# Allegro board HY_TYPEC_DBUG_V10B.brd
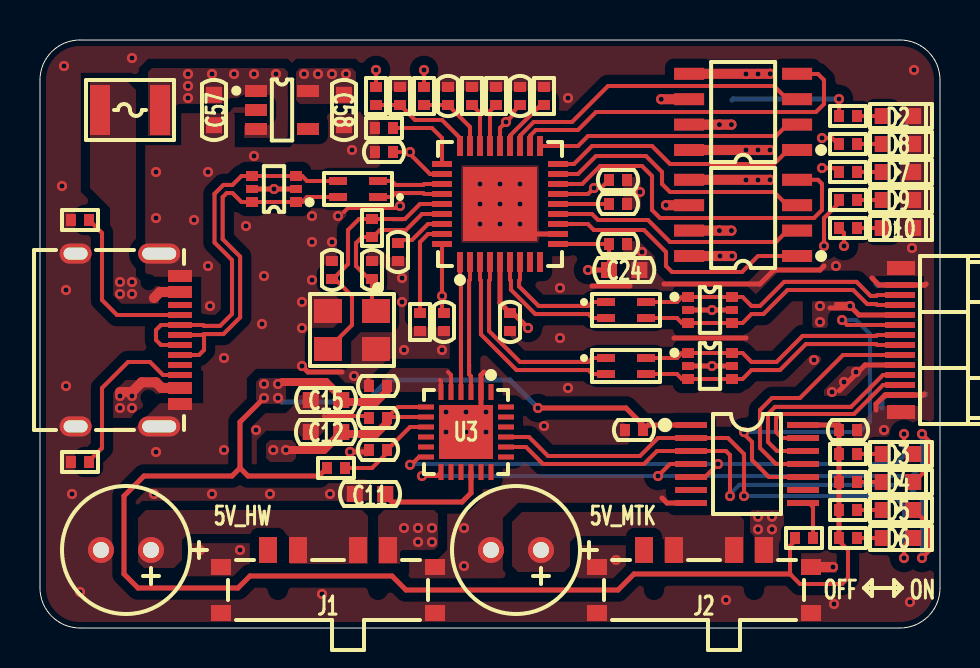
[diagram p0: board, top side]
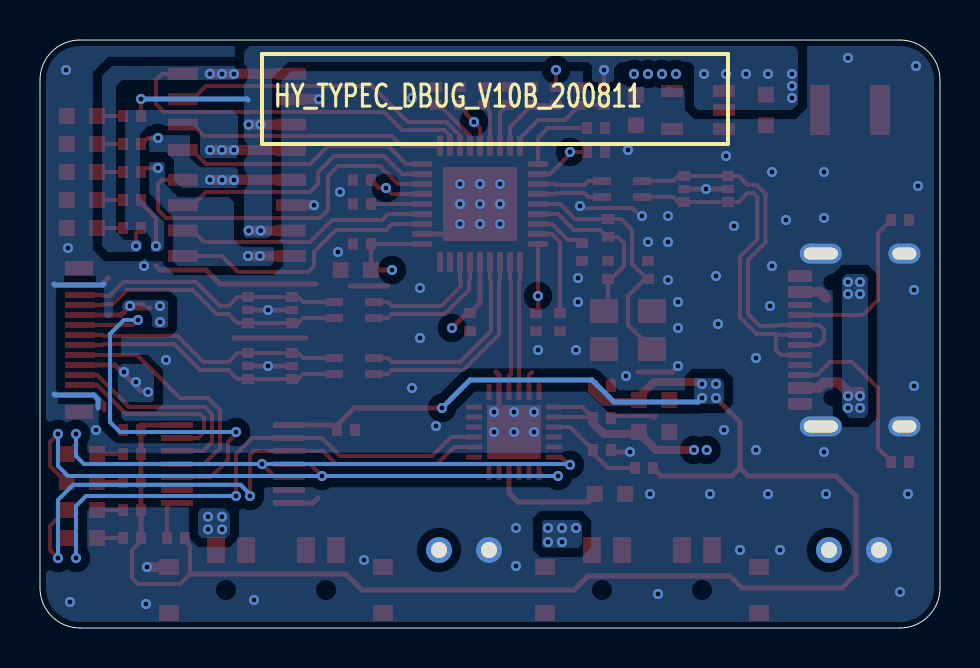
[diagram p1: board, bottom side, seen from below]

Outline 45 x 29.4 mm; copper layers: TOP, L02_GND, L03_VCC, BOTTOM. Coordinates in mm from the lower left corner of the outline.
Outline path: 0,27.4 arc(0.59,28.81) 2,29.4 43,29.4 arc(44.41,28.81) 45,27.4 45,2 arc(44.41,0.59) 43,0 2,0 arc(0.59,0.59) 0,2 0,27.4

## Design rules (mm)
constraint set DEFAULT: min track width 0.203, pair gap 0.203
net group HW_USB_D: nets HW_USB_DM HW_USB_DP
net group MTK_USB_D: nets MTK_USB_DM MTK_USB_DP
net group USB_D: nets USB_DM USB_DP
net group USBDN1_D: nets USBDN1_DM USBDN1_DP
net group USBDN2_D: nets USBDN3_DM USBDN3_DP
net group USBDN3_D: nets USBDN2_DM USBDN2_DP
net group USBDN4_D: nets USBDN4_DM USBDN4_DP
net group USBUP_D: nets USBUP_DM USBUP_DP

## Placement (name value [footprint] x y rotation side)
C2  8pF_50V  [C0402]  16.6 17.9 270 top
C3  8pF_50V  [C0402]  14.6 17.9 270 top
C11  10uF_10V  [C0603]  16.5 6.7 180 top
C12  10uF_10V  [C0603]  14.3 9.8 0 top
C14  100nF_50V  [C0402]  16.9 10.5 0 top
C15  10uF_10V  [C0603]  14.3 11.4 0 top
C16  100nF_50V  [C0402]  16.9 12.1 0 top
C17  100nF_50V  [C0402]  20.4 26.6 270 top
C18  100nF_50V  [C0402]  17.9 18.8 90 top
C19  100nF_50V  [C0402]  28.9 21.2 180 top
C20  100nF_50V  [C0402]  20.2 15.3 90 top
C21  100nF_50V  [C0402]  17.2 23.8 0 top
C22  100nF_50V  [C0402]  28.9 22.4 180 top
C23  100nF_50V  [C0402]  24 26.6 270 top
C24  10uF_10V  [C0603]  29.21 17.9 0 top
C25  100nF_50V  [C0402]  23.5 15.3 90 top
C26  100nF_50V  [C0402]  28.9 19.2 180 top
C55  470uF_6V3  [CAP-2R5-6R3X7]  23.8 3.9 180 top
C56  470uF_6V3  [CAP-2R5-6R3X7]  4.3 3.9 180 top
C57  10uF_10V  [C0603]  8.7 25.9 270 top
C58  10uF_10V  [C0603]  15.2 25.9 270 top
C59  100nF_50V  [C0402]  16.9 8.9 0 top
C60  100nF_50V  [C0402]  40.4 9.9 0 top
C61  100nF_50V  [C0402]  29.7 9.9 180 top
D2  LED_GREEN  [LED0603]  42.9 25.6 0 top
D3  LED_RED  [LED0603]  42.9 8.7 0 top
D4  LED_GREEN  [LED0603]  42.9 7.3 0 top
D5  LED_RED  [LED0603]  42.9 5.9 0 top
D6  LED_GREEN  [LED0603]  42.9 4.5 0 top
D7  LED_GREEN  [LED0603]  42.9 22.8 0 top
D8  LED_GREEN  [LED0603]  42.9 24.2 0 top
D9  LED_GREEN  [LED0603]  42.9 21.4 0 top
D10  LED_GREEN  [LED0603]  42.9 20 0 top
F1  SMD1210-200  [FUSE1210]  4.5 25.9 180 top
J1  -  [K3-1208S-E1]  14.4 1.9 0 top
J2  -  [K3-1208S-E1]  33.2 1.9 0 top
L2  ACM2012-900-2P-T002  [ACM2012]  15.9 21.95 180 top
L3  ACM2012-900-2P-T002  [ACM2012]  29.3 13.1 0 top
L4  ACM2012-900-2P-T002  [ACM2012]  29.3 15.9 0 top
NOREF  -  []  0 0 90 top
NOREF#2  -  []  0 0 0 top
R9  10K  [R0402]  40.4 25.6 180 top
R10  10K  [R0402]  14.8 8 0 top
R11  4.7K  [R0402]  2 20.4 0 top
R12  10K  [R0402]  40.4 8.7 180 top
R13  10K  [R0402]  40.4 7.3 180 top
R14  10K  [R0402]  40.4 5.9 180 top
R15  4.7K/NI  [R0402]  2 8.3 180 top
R16  10K  [R0402]  40.4 4.5 180 top
R17  100K  [R0402]  16.8 26.6 270 top
R18  100K  [R0402]  18 26.6 270 top
R19  100K  [R0402]  17.2 25 0 top
R20  100K  [R0402]  19.2 26.6 270 top
R21  12K  [R0402]  19 15.3 270 top
R22  100K  [R0402]  21.6 26.6 270 top
R23  100K  [R0402]  22.8 26.6 270 top
R24  100K  [R0402]  25.2 26.6 270 top
R25  10K  [R0402]  40.4 22.8 180 top
R26  10K  [R0402]  40.4 24.2 180 top
R27  10K  [R0402]  40.4 21.4 180 top
R28  10K  [R0402]  40.4 20 180 top
R29  1M  [R0402]  16.6 20 270 top
R30  10K  [R0402]  38.2 4.5 0 top
U2  NX3225GA-24MHZ  [X-4P-3R2X2R5-SMD]  15.6 14.9 180 top
U3  CP2105  [QFN24-4X4X0R5-2R7X2R7]  21.3 9.8 180 top
U4  TPD4E1U06DCKR  [SOT363]  33.5 15.9 270 top
U5  -  [U261-24XN-4BS60]  43 14.4 270 top
U6  TPD4E1U06DCKR  [SOT363]  33.5 13.1 270 top
U7  TPD4E1U06DCKR  [SOT363]  11.7 21.95 90 top
U8  USB2514B_QFN36_MIN  [QFN36-6X6X0R5-3R7X3R7]  23 21.2 0 top
U9  MIC2026-1YM  [SOIC8]  35.15 20.5 90 top
U10  MIC2026-1YM  [SOIC8]  35.15 25.8 90 top
U29  SPX3819M5-L-3-3/TR  [SOT23-5]  12.1 25.9 270 top
U30  TXS0104EPWR  [TSSOP14]  35.35 8.2 270 top
USB1  -  [TYPE-C-31-M-12]  7 14.4 270 top

## Library data of the parts
C2 C3 C12 C14-C16 C24 C57-C61 = CAP NP_2
C11 C17-C23 C25 C26 = CAP NP
C55 C56 = CAPT_100UF_3528_6r3V_10%_LXXXX
D2-D10 = LED_4
F1 = FUSE
J1 J2 = K3-1208S-E1
L2-L4 = 744822222_0
R9-R30 = R_Generic
U2 = TSX-3225
U3 = CP2105_9
U4 U6 U7 = TPD4E1U06DBVR
U5 = USB-C-24P
U8 = USB2514B_QFN36_MIN
U9 U10 = MIC2026-1YM
U29 = SPX3819M5-L-1-2
U30 = TXB0104PWR
USB1 = TYPE-C_16P

## Footprints (pads in the part's own frame, mm; a bottom-side part is the same pattern mirrored in y, then rotated)
ACM2012
  rect 0.9x0.4 smd: 1(-1,0.4) 2(-1,-0.4) 3(1,-0.4) 4(1,0.4)
C0402
  rect 0.5x0.6 smd: 1(-0.45,0) 2(0.45,0)
C0603
  rect 0.8x0.8 smd: 1(-0.762,0) 2(0.762,0)
CAP-2R5-6R3X7
  round 1.3 hole 0.8: 1(-1.25,0) 2(1.25,0)
FUSE1210
  rect 1x2.5 smd: 1(-1.5,0) 2(1.5,0)
K3-1208S-E1
  rect 1x0.8 smd: 1(-5.35,1.15) 2(-5.35,-1.15) 3(5.35,-1.15) 4(5.35,1.15)
  rect 0.9x1.3 smd: 5(3,2) 6(1.5,2) 7(-1.5,2) 8(-3,2)
LED0603
  rect 0.8x0.8 smd: 1(-0.762,0) 2(0.762,0)
QFN24-4X4X0R5-2R7X2R7
  rect 0.25x0.8 smd: 1(-1.25,-2) 2(-0.75,-2) 3(-0.25,-2) 4(0.25,-2) 5(0.75,-2) 6(1.25,-2) 13(1.25,2) 14(0.75,2) 15(0.25,2) 16(-0.25,2) 17(-0.75,2) 18(-1.25,2)
  rect 0.8x0.25 smd: 7(2,-1.25) 8(2,-0.75) 9(2,-0.25) 10(2,0.25) 11(2,0.75) 12(2,1.25) 19(-2,1.25) 20(-2,0.75) 21(-2,0.25) 22(-2,-0.25) 23(-2,-0.75) 24(-2,-1.25)
  rect 2.7x2.7 smd: 25(0,0)
QFN36-6X6X0R5-3R7X3R7
  rect 0.3x1 smd: 1(-2,-2.9) 2(-1.5,-2.9) 3(-1,-2.9) 4(-0.5,-2.9) 5(0,-2.9) 6(0.5,-2.9) 7(1,-2.9) 8(1.5,-2.9) 9(2,-2.9) 19(2,2.9) 20(1.5,2.9) 21(1,2.9) 22(0.5,2.9) 23(0,2.9) 24(-0.5,2.9) 25(-1,2.9) 26(-1.5,2.9) 27(-2,2.9)
  rect 1x0.3 smd: 10(2.9,-2) 11(2.9,-1.5) 12(2.9,-1) 13(2.9,-0.5) 14(2.9,0) 15(2.9,0.5) 16(2.9,1) 17(2.9,1.5) 18(2.9,2) 28(-2.9,2) 29(-2.9,1.5) 30(-2.9,1) 31(-2.9,0.5) 32(-2.9,0) 33(-2.9,-0.5) 34(-2.9,-1) 35(-2.9,-1.5) 36(-2.9,-2)
  rect 3.7x3.7 smd: 37(0,0)
R0402
  rect 0.5x0.6 smd: 1(-0.45,0) 2(0.45,0)
SOIC8
  rect 0.6x1.5 smd: 1(-1.9,-2.7) 2(-0.63,-2.7) 3(0.64,-2.7) 4(1.91,-2.7) 5(1.91,2.7) 6(0.64,2.7) 7(-0.63,2.7) 8(-1.9,2.7)
SOT23-5
  rect 0.6x1.1 smd: 1(-0.95,-1.3) 2(0,-1.3) 3(0.95,-1.3) 4(0.95,1.3) 5(-0.95,1.3)
SOT363
  rect 0.5x0.6 smd: 1(-0.65,-1.1) 3(0.65,-1.1) 4(0.65,1.1) 6(-0.65,1.1)
  rect 0.4x0.6 smd: 2(0,-1.1) 5(0,1.1)
TSSOP14
  rect 0.3x1.6 smd: 1(-1.95,-2.8) 2(-1.3,-2.8) 3(-0.65,-2.8) 4(0,-2.8) 5(0.65,-2.8) 6(1.3,-2.8) 7(1.95,-2.8) 8(1.95,2.8) 9(1.3,2.8) 10(0.65,2.8) 11(0,2.8) 12(-0.65,2.8) 13(-1.3,2.8) 14(-1.95,2.8)
TYPE-C-31-M-12
  rect 0.6x1.2 smd: 1(-3.2,0) 2(-2.4,0) 11(2.4,0) 12(3.2,0)
  rect 0.3x1.2 smd: 3(-1.75,0) 4(-1.25,0) 5(-0.75,0) 6(-0.25,0) 7(0.25,0) 8(0.75,0) 9(1.25,0) 10(1.75,0)
  oval 1x2.1 hole 0.6x1.7: 13(-4.32,-1.04) 14(4.32,-1.04)
  oval 1x1.6 hole 0.6x1.2: 15(-4.32,-5.22) 16(4.32,-5.22)
U261-24XN-4BS60
  rect 0.7x1.4 smd: 1(-3.6,0.05) 2(3.6,0.05) 3(3.6,0.05) 4(-3.6,0.05)
  rect 0.3x1.5 smd: A1(-2.75,0) A2(-2.25,0) A3(-1.75,0) A4(-1.25,0) A5(-0.75,0) A6(-0.25,0) A7(0.25,0) A8(0.75,0) A9(1.25,0) A10(1.75,0) A11(2.25,0) A12(2.75,0) B1(2.75,0) B2(2.25,0) B3(1.75,0) B4(1.25,0) B5(0.75,0) B6(0.25,0) B7(-0.25,0) B8(-0.75,0) B9(-1.25,0) B10(-1.75,0) B11(-2.25,0) B12(-2.75,0)
X-4P-3R2X2R5-SMD
  rect 1.4x1.2 smd: 1(-1.2,-0.95) 2(1.2,-0.95) 3(1.2,0.95) 4(-1.2,0.95)

## Nets
GND: C2.1 C3.1 C11.2 C12.1 C14.1 C15.1 C16.1 C17.1 C18.1 C19.1 C20.1 C21.1 C22.1 C23.1 C24.2 C25.1 C26.1 C55.2 C56.2 C57.2 C58.2 C59.1 C60.2 C61.2 D2.2(CATHODE) D7.2(CATHODE) D8.2(CATHODE) D9.2(CATHODE) D10.2(CATHODE) J1.1 J1.2 J1.3 J1.4 J2.1 J2.2 J2.3 J2.4 R11.1 R15.2 R18.1 R19.1 R21.2 R22.1 R23.1 R24.1 U2.2 U2.4 U3.2 U3.25 U4.2 U4.5(NC) U5.1 U5.2 U5.3 U5.4 U5.A1 U5.A12 U5.B1 U5.B12 U6.2 U6.5(NC) U7.2 U7.5(NC) U8.11 U8.37 U9.6 U10.6 U29.2 U30.7 USB1.1 USB1.12 USB1.13 USB1.14 USB1.15 USB1.16
VCC_3.3V: C20.2 C21.2 C22.2 C23.2 C24.1 C25.2 C26.2 C58.1 R20.1 U8.5 U8.10 U8.15 U8.23 U8.29 U8.36 U29.5(VOUT)
VCC_3.3V_CP2105: C15.2 C16.2 C60.1 C61.1 R10.1 R12.2 R13.2 R14.2 R16.2 R30.1 U3.5(VIO) U3.6 U30.1 U30.14(VCCB)
VCC_5V_HW: J1.5 U5.A9
VCC_5V_MTK: J2.5 U5.A4
VCC_5V_VBUS: C57.1 F1.1 R9.2 R17.1 U9.7 U10.7 U29.1 U29.3
VCC_PWR1: C12.2 C14.2 R25.2 U3.7 U3.8 U9.8
VCC_PWR2: C56.1 J1.6 J1.7 R26.2 U9.5(OUTB)
VCC_PWR3: C55.1 J2.6 J2.7 R27.2 U10.8
VCC_PWR4: R28.2 U10.5(OUTB)
HW_RX: U5.A11 U30.13
HW_TX: U5.A10 U30.12
HW_USB_DM: L3.3 U5.A7 U6.3 U6.4
HW_USB_DP: L3.4 U5.A6 U6.1 U6.6
MTK_RX: U5.A8 U30.11
MTK_TX: U5.A5 U30.10
MTK_USB_DM: L4.3 U4.3 U4.4 U5.A3
MTK_USB_DP: L4.4 U4.1 U4.6 U5.A2
OCS_N1: U8.13 U9.2
OCS_N2: U8.17 U9.3
OCS_N3: U8.19 U10.2
OCS_N4: U8.21 U10.3
PRTPWR1: U8.12 U9.1
PRTPWR2: U8.16 U9.4
PRTPWR3: U8.18 U10.1
PRTPWR4: U8.20 U10.4
RESETN: C17.2 R20.2 U8.26
T_HW_RX: D6.2(CATHODE) U3.21 U30.2
T_HW_TX: D5.2(CATHODE) U3.20 U30.3
T_MTK_RX: D4.2(CATHODE) U3.13 U30.4
T_MTK_TX: D3.2(CATHODE) U3.12 U30.5
USB_DM: L2.3 U7.3 U7.4 USB1.5 USB1.7
USB_DP: L2.4 U7.1 U7.6 USB1.6 USB1.8
USBDN1_DM: U3.4 U8.1
USBDN1_DP: U3.3 U8.2
USBDN2_DM: L3.2 U8.3
USBDN2_DP: L3.1 U8.4
USBDN3_DM: L4.2 U8.6
USBDN3_DP: L4.1 U8.7
USBDN4_DM: U8.8
USBDN4_DP: U8.9
USBUP_DM: L2.2 U8.30
USBUP_DP: L2.1 U8.31
XTAL1: C2.2 R29.2 U2.1 U8.33
XTAL2: C3.2 R29.1 U2.3(OUT2) U8.32(XTAL2/CLKIN_EN)
N17371022: D2.1 R9.1
N17384741: R17.2 R18.2 U8.27
N17384990: R19.2 U8.28
N17385565: C18.2 U8.34
N17385621: C19.2 U8.14
N17386850: R21.1 U8.35
N17387208: R24.2 U8.22
N17387211: R23.2 U8.24
N17387214: R22.2 U8.25
N17388288: D7.1 R25.1
N17388415: D8.1 R26.1
N17388544: D9.1 R27.1
N17388675: D10.1 R28.1
N17392787: C11.1 U3.16
N17392839: C59.2 R10.2 U3.9
N17392961: D3.1 R12.1
N17392986: D4.1 R13.1
N17393011: D5.1 R14.1
N17393034: D6.1 R16.1
N17394522: R11.2 USB1.4
N17394528: F1.2 USB1.2 USB1.11(VBUS2)
N17394640: R15.1 USB1.10
N17401111: R30.2 U30.8

Pads without a net: J1 8; J2 8; U3 1 10 11 14 15 17 18 19 22 23 24; U5 B2 B3 B4 B5 B6 B7 B8 B9 B10 B11; U29 4; U30 6 9; USB1 3 9

## Via types
v1: diameter 0.508, hole 0.254, TOP to BOTTOM, 164 vias

## Routing (per net, layer and track width the routed paths; a pad name or vN(x,y) marks a point on that pad's centre or on a via; arc(x,y) is an arc through that point)
GND: length 52.6
  TOP w0.203: 15.2,20.8 15.4,21 17.9,21 v1(18,21.1) ; C14.1 16.35,10.6 14.4,10.6 14.3,10.5 14.2,10.6 ; C16.1 16.45,12.35 16.4,12.4
  TOP w0.254: U6.2 v1(33.6,13.1) U6.5 ; C59.1 16.36,8.81 v1(15.5,8.81) ; 31.2,17.2 36,17.2 36.7,17.9 39,17.9 39.2,18.1 ; 22.2,12.8 22.05,12.65 U3.2 22.05,11.05 v1(22.3,10.8) v1(21.3,9.8) ; 15.1,12.8 13.4,12.8 v1(13.1,13.1) ; U7.5 v1(11.7,21.95) U7.2 ; 41.8,10.9 41.8,11.2 42.25,11.65 U5.A12 44.15,11.65 44.2,11.7 ; U8.11 24.5,19.7 v1(24,20.2) v1(23,21.2) ; 44.3,17.2 44.25,17.15 U5.A1 41.95,17.15 41.6,17.5 ; U4.2 v1(33.6,15.9) U4.5 ; 31.7,14.5 35.3,14.5 ; U30.7 31.35,6.25 31.1,6.5 ; 27.6,17.1 29.5,17.1
  TOP w0.508: U10.6 v1(31.06,26.44) ; U9.6 v1(31.3,21.14) ; J2.4 v1(39.65,3.05)
  BOTTOM w0.254: 41.8,17.2 41.85,17.15 U5.A1 44.25,17.15 44.3,17.2 ; 44.3,11.7 44.25,11.65 U5.A12 42.31,11.65 42.1,11.43 42.1,11
  vias: v1(1.1,22.1) v1(1.2,28.1) v1(1.3,16.9) v1(1.3,12.1) v1(1.6,6.7) v1(2,1.8) v1(4.6,28.5) v1(5.7,6.7) v1(5.8,22.8) v1(5.8,20.5) v1(5.8,8.8) v1(7.7,20.4) v1(8,3.9) v1(8.4,22.8) v1(8.4,18.1) v1(8.5,16.1) v1(8.6,6.7) v1(9.2,13.5) v1(9.2,8.9) v1(10,3.9) v1(10.3,20.1) v1(10.7,23.6) v1(10.8,9.9) v1(11.1,15.2) v1(11.2,17.6) v1(11.5,6.7) v1(13.1,16.3) v1(13.1,15) v1(13.6,20.6) v1(13.6,19.3) v1(13.6,17.4) v1(14.1,1.7) v1(14.5,6.7) v1(14.6,19.3) v1(14.9,20.6) v1(15.6,23.9) v1(15.7,12.6) v1(18.1,17.5) v1(18.1,16.3) v1(18.2,13.9) v1(20.1,13.9) v1(20.3,10.8) v1(20.3,9.8) v1(21.2,5) v1(21.2,3.1) v1(21.3,10.8) v1(22,22.2) v1(22,21.2) v1(22,20.2) v1(22.3,9.8) v1(23,22.2) v1(23,20.2) v1(24,22.2) v1(24,21.2) v1(25.2,10.1) v1(26,17) v1(26,14.5) v1(26.4,26.5) v1(26.4,12) v1(28.8,3.4) v1(30,21.8) v1(30.1,18.8) v1(34.3,1.4) v1(38.7,13.4) v1(39.7,1.2) v1(39.8,18.1) v1(42.2,9.9) v1(43.5,1.3) v1(43.6,19) v1(43.7,27.9)
VCC_3.3V: length 21.5
  TOP w0.203: U8.23 23,25 v1(23.3,25.3) 23.7,25.7 23.7,25.85 C23.2 ; C21.2 v1(18.5,23.8) 18.5,23.7 19.5,22.7 U8.29 ; C20.2 20.1,15.85 v1(20.1,16.6) U8.36 ; U8.10 C26.2 C24.1 ; U8.15 27.4,21.7 v1(27.7,22) 28.05,22 C22.2 ; R20.1 v1(19.2,27.9)
  TOP w0.254: v1(24.4,15) 23.65,15.75 C25.2 23,16.25 U8.5 ; C24.1 v1(27.4,17.9)
  vias: v1(13.2,27.7) v1(13.9,27.7) v1(14.6,27.7) v1(15.3,27.7)
VCC_3.3V_CP2105: length 98.6
  TOP w0.203: 20.4,12.8 20.55,12.65 U3.5 ; R30.1 37.75,4.35 37.5,4.1 37.5,2.7 38,2.2 40.1,2.2 40.4,2.5 40.4,3.9 39.95,4.35 R16.2 ; 20,12.4 20.05,12.35 U3.6
  TOP w0.254: R10.1 13.95,7.6 10.4,7.6 10,8 ; v1(11.2,11.5) 10,10.3 10,8 ; R16.2 R14.2 R13.2 R12.2 C60.1 39.95,10.15 U30.14 ; 10,8 9.6,7.6 5.2,7.6 4.2,6.6 4.2,2.7 4.9,2 9.9,2 10.5,2.6 17.6,2.6 18.3,1.9 28.9,1.9 29.7,2.7 37.5,2.7 ; v1(24.9,11) 29.3,11 30.15,10.15 C61.1 30.4,10.15 U30.1
  TOP w0.4: 12.1,12.3 14.3,12.3 15.06,11.54 C15.2 15.16,11.3 16.8,11.3 17.35,11.85 C16.2
  BOTTOM w0.254: v1(11.9,11.5) 12.1,11.3 16.3,11.3 17.4,12.4 23.5,12.4 v1(24.9,11)
  vias: v1(11.2,12.2) v1(11.9,12.2)
VCC_5V_HW: length 3.6
  TOP w0.254: 39.97,11.87 41.25,13.15 U5.A9
  vias: v1(18.2,5) v1(18.9,5) v1(18.9,4.3) v1(19.6,5) v1(19.6,4.3) v1(39.6,11.8) v1(40.2,12.3) v1(40.8,12.8)
VCC_5V_MTK: length 4.5
  TOP w0.203: v1(40.5,16.1) 40.4,16.1 40.3,16.2 39.8,16.2
  TOP w0.254: U5.A4 40.95,15.65 v1(40.5,16.1) 40.4,16 39.5,16
  vias: v1(35.9,5.57) v1(35.9,4.93) v1(36.6,5.57) v1(36.6,4.93) v1(39,16.1) v1(39,15.3)
VCC_5V_VBUS: length 11.3
  TOP w0.203: R17.1 v1(16.8,27.9) ; R9.2 v1(39.95,26.45)
  TOP w0.508: v1(34.57,19.87) v1(33.97,19.87) U9.7 ; v1(34.57,25.17) v1(33.97,25.17) U10.7
  BOTTOM w0.254: 34.6,26.4 34.65,26.45 v1(39.95,26.45)
  vias: v1(7.4,27.7) v1(7.4,27.1) v1(7.4,26.5) v1(8.6,27.7) v1(9.7,27.7) v1(10.7,27.7) v1(11.8,27.7)
VCC_PWR1: length 13.1
  TOP w0.203: 17.4,10.55 C14.2 ; 17.4,10.55 17.9,11.05 U3.7 ; 17.4,10.55 U3.8 ; R25.2 39.9,22.8 39.7,23 v1(39.1,23)
  TOP w0.4: v1(12.3,8.9) 14.2,8.9 15.06,9.76 C12.2 15.16,9.7 16.8,9.7 17.35,10.25 C14.2
  TOP w0.508: U9.8 v1(34,18.6) v1(34.6,18.6)
  vias: v1(11.66,8.9)
VCC_PWR2: length 5
  TOP w0.203: R26.2 39.9,24.2 39.6,24.5 v1(39.1,24.5)
  TOP w0.508: U9.5 v1(36.5,22.41)
  vias: v1(35.3,22.4) v1(35.9,22.4)
VCC_PWR3: length 6.7
  TOP w0.203: v1(39.2,19.1) 39.2,20.5 39.95,21.25 R27.2
  TOP w0.508: v1(36.5,23.9) v1(35.9,23.9) v1(35.3,23.9) U10.8
VCC_PWR4: length 5.1
  TOP w0.203: R28.2 40.2,19.75 v1(40.2,19.1)
  TOP w0.508: U10.5 v1(36.51,27.71)
  vias: v1(35.3,27.7) v1(35.9,27.7)
HW_RX: length 9.1
  TOP w0.203: U30.13 37.1,9.5 36.8,9.8 36.8,10.5 37,10.7 40.7,10.7 42.15,12.15 U5.A11
HW_TX: length 10.7
  TOP w0.203: U5.A10 42.15,12.65 40.55,11.06 36.75,11.06 36.4,10.7 36.4,9.3 36.85,8.85 U30.12
HW_USB_DM: length 13.5
  TOP w0.203: L3.3 31.85,12.7 32.1,12.45 U6.3 U6.4 35.13,12.45 35.58,12.9 37,12.9 38.3,14.2 41.82,14.2 41.87,14.15 U5.A7
HW_USB_DP: length 13.5
  TOP w0.203: L3.4 31.85,13.5 32.1,13.75 U6.1 U6.6 35.13,13.75 35.58,13.3 36.83,13.3 38.13,14.6 41.82,14.6 41.87,14.65 U5.A6
MTK_RX: length 12.5
  TOP w0.203: U5.A8 40.15,13.65 38,11.5 36.6,11.5 36,10.9 36,9 36.8,8.2 U30.11
MTK_TX: length 20.1
  TOP w0.203: v1(35.2,9.8) 35.2,9.7 35.6,9.3 35.6,8.4 36.45,7.55 U30.10 ; U5.A5 40.35,15.15 v1(40.1,15.4)
  BOTTOM w0.203: v1(35.2,9.8) 41,9.8 41.5,10.3 41.5,14.7 40.8,15.4 v1(40.1,15.4)
MTK_USB_DM: length 13.8
  TOP w0.203: U5.A3 41.87,16.15 41.82,16.2 41.36,16.2 40.66,16.9 37.37,16.9 36.17,15.7 35.58,15.7 35.13,15.25 U4.4 U4.3 32.1,15.25 31.85,15.5 L4.3
MTK_USB_DP: length 13.8
  TOP w0.203: U5.A2 41.87,16.65 41.82,16.6 41.53,16.6 40.83,17.31 37.21,17.31 36,16.1 35.58,16.1 35.13,16.55 U4.6 U4.1 32.1,16.55 31.85,16.3 L4.4
OCS_N1: length 12.8
  TOP w0.203: U8.13 27.6,20.7 27.9,20.4 30.4,20.4 31.5,19.3 36.8,19.3 37.37,19.87 U9.2
OCS_N2: length 13.7
  TOP w0.203: U9.3 37.36,21.14 36.7,21.8 31.5,21.8 31.1,22.2 31.1,22.8 30.3,23.6 27.8,23.6 26.9,22.7 U8.17
OCS_N3: length 13.3
  TOP w0.203: U10.2 37.82,25.2 37.4,25.2 36.8,24.6 27.4,24.6 26.9,24.1 U8.19
OCS_N4: length 15.7
  TOP w0.203: U10.3 37.81,26.4 37.4,26.4 36.7,27.1 28.4,27.1 26.6,25.3 24.69,25.3 24,24.61 U8.21
PRTPWR1: length 13.7
  TOP w0.203: U9.1 35.9,18.6 35.1,17.8 31.6,17.8 31.3,18.1 31.3,18.8 30.2,19.9 27.69,19.9 27.39,20.2 U8.12
PRTPWR2: length 18.4
  TOP w0.203: U8.16 27.11,22.2 28.01,23.1 30.1,23.1 30.6,22.6 30.6,20.9 31,20.5 38.7,20.5 39.1,20.9 39.1,22.21 38.9,22.41 U9.4
PRTPWR3: length 13
  TOP w0.203: U10.1 37.4,23.9 36.7,23.2 31.5,23.2 30.6,24.1 27.6,24.1 26.7,23.2 U8.18
PRTPWR4: length 18.5
  TOP w0.203: U10.4 37.86,27.7 38.9,27.7 39.2,27.4 39.2,26.2 38.8,25.8 27.8,25.8 26.9,24.9 24.79,24.9 24.5,24.61 U8.20
RESETN: length 3.7
  TOP w0.203: U8.26 21.5,25.05 C17.2 R20.2
T_HW_RX: length 27.1
  TOP w0.203: D6.2 43.6,4.5 43.2,4.1 v1(43.2,3.5) ; U3.21 24.45,9.55 25.4,8.6 30,8.6 30.9,9.5 U30.2 34.4,9.5 35.2,8.7 v1(35.2,6.6)
  BOTTOM w0.203: v1(43.2,3.5) 43.2,6.1 42.7,6.6 v1(35.2,6.6)
T_HW_TX: length 30
  TOP w0.203: D5.2 43.7,5.9 44.5,5.1 44.5,3.9 v1(44.1,3.5) ; v1(34.5,6.6) 34.5,8.65 34.3,8.85 U30.3 30.85,8.85 30.2,8.2 25.15,8.2 24.3,9.05 U3.20
  BOTTOM w0.203: v1(34.5,6.6) 34.5,6.69 34.97,7.16 43.34,7.16 44.1,6.4 v1(44.1,3.5)
T_MTK_RX: length 32.7
  TOP w0.203: v1(19.1,7.6) 19.85,7.6 U3.13 ; U30.4 31.5,8.2 v1(30.9,7.6) ; D4.2 43.7,7.3 44.5,8.1 44.5,9.3 v1(44.1,9.7)
  BOTTOM w0.203: v1(44.1,9.7) 44.1,8.1 43.6,7.6 v1(30.9,7.6) v1(19.1,7.6)
T_MTK_TX: length 29.8
  TOP w0.203: D3.2 43.66,8.74 43.2,9.2 v1(43.2,9.7) ; v1(33.9,8.2) 33.25,7.55 U30.5 ; v1(18.5,8.16) 18.56,8.16 18.95,8.55 U3.12
  BOTTOM w0.203: v1(18.5,8.16) 18.54,8.2 v1(33.9,8.2) 42.8,8.2 43.2,8.6 v1(43.2,9.7)
USB_DM: length 19
  TOP w0.203: L2.3 13.35,22.35 13.1,22.6 U7.3 U7.4 10.07,22.6 9.62,22.15 9.17,22.15 8.73,21.71 8.73,19.27 9.6,18.4 9.6,15.7 9.01,15.11 8.19,15.11 8.15,15.15 USB1.5 6.05,15.15 5.8,14.9 5.8,14.4 6.05,14.15 USB1.7
USB_DP: length 18
  TOP w0.203: USB1.6 8.15,14.65 8.2,14.7 ; 8.2,14.7 9.17,14.7 10.01,15.53 10.01,18.57 9.13,19.44 9.13,21.54 9.34,21.75 9.62,21.75 10.07,21.3 U7.6 U7.1 13.1,21.3 13.35,21.55 L2.4 ; 8.2,14.7 8.2,13.9 7.95,13.65 USB1.8
USBDN1_DM: length 6.5
  TOP w0.203: U3.4 21.05,12.97 21.05,12.97 21.05,17.37 21,17.41 U8.1
USBDN1_DP: length 6.6
  TOP w0.203: U3.3 21.55,12.59 21.46,12.68 21.46,13.13 21.45,13.14 21.45,17.37 21.5,17.41 U8.2
USBDN2_DM: length 10.7
  TOP w0.203: L3.2 27.61,12.7 27.42,12.9 23.83,12.9 22.05,14.68 22.05,17.37 22,17.41 U8.3
USBDN2_DP: length 10
  TOP w0.203: L3.1 27.61,13.5 27.42,13.3 24,13.3 22.45,14.85 22.45,17.37 22.5,17.41 U8.4
USBDN3_DM: length 6.7
  TOP w0.203: L4.2 27.61,15.5 27.42,15.7 24.76,15.7 23.55,16.91 23.55,17.37 23.5,17.41 U8.6
USBDN3_DP: length 6.1
  TOP w0.203: U8.7 24,17.41 23.95,17.37 23.95,17.08 24.93,16.1 27.42,16.1 27.61,16.3 L4.1
USBUP_DM: length 3.3
  TOP w0.203: L2.2 17.59,22.35 17.78,22.15 19.17,22.15 19.21,22.2 U8.30
USBUP_DP: length 3.3
  TOP w0.203: U8.31 19.21,21.7 19.17,21.75 17.78,21.75 17.59,21.55 L2.1
XTAL1: length 8.8
  TOP w0.203: U2.1 16.6,16.05 C2.2 16.45,17.45 15.8,18.1 15.8,19.25 16.1,19.55 R29.2 16.65,19.55 17,19.9 18.3,19.9 19.1,20.7 U8.33
XTAL2: length 12.5
  TOP w0.203: C3.2 14.65,17.45 ; 14.65,17.45 15.4,18.2 15.4,19.9 15.95,20.45 R29.1 17.66,20.45 17.67,20.44 18.13,20.44 18.14,20.45 18.25,20.45 19,21.2 U8.32 ; 14.65,17.45 14.75,17.45 15.6,16.6 15.6,15.15 U2.3
N17371022: length 1.3
  TOP w0.203: R9.1 D2.1
N17384741: length 5.3
  TOP w0.203: U8.27 21,24.5 20.1,25.4 18.75,25.4 R18.2 R17.2
N17384990: length 4
  TOP w0.203: U8.28 20.1,24.5 19.6,25 R19.2
N17385565: length 2.6
  TOP w0.203: U8.34 19.4,20.2 18.6,19.4 18.05,19.4 C18.2
N17385621: length 2.6
  TOP w0.203: U8.14 C19.2
N17386850: length 4.8
  TOP w0.203: R21.1 19,19.3 19.4,19.7 U8.35
N17387208: length 2.9
  TOP w0.203: R24.2 25.03,26.15 23.5,24.62 U8.22
N17387211: length 2.2
  TOP w0.203: U8.24 22.5,25.85 R23.2
N17387214: length 2.2
  TOP w0.203: R22.2 22,25.75 U8.25
N17388288: length 1.3
  TOP w0.203: R25.1 D7.1
N17388415: length 1.3
  TOP w0.203: R26.1 D8.1
N17388544: length 1.3
  TOP w0.203: R27.1 D9.1
N17388675: length 1.3
  TOP w0.203: R28.1 D10.1
N17392787: length 5.7
  TOP w0.203: 17.26,6.64 C11.1
  TOP w0.254: U3.16 21.55,6.75 21.1,6.3 17.6,6.3 17.26,6.64
N17392839: length 5
  TOP w0.203: R10.2 16.6,8 17.35,8.75 C59.2 18.5,10.05 U3.9
N17392961: length 1.3
  TOP w0.203: R12.1 D3.1
N17392986: length 1.3
  TOP w0.203: R13.1 D4.1
N17393011: length 1.3
  TOP w0.203: R14.1 D5.1
N17393034: length 1.3
  TOP w0.203: R16.1 D6.1
N17394522: length 8.5
  TOP w0.203: USB1.4 3.85,15.65 3.1,16.4 3.1,19.75 R11.2
N17394528: length 4.7
  TOP w0.508: USB1.2 6,16.8 5.7,16.5 ; USB1.11 6.08,12 5.8,12.28 5.08,12.28 4.6,11.8 4,11.8
  vias: v1(4,17.3) v1(4,16.7) v1(4,11.6) v1(4,11) v1(4.6,17.3) v1(4.6,16.7) v1(4.6,11.6) v1(4.6,11)
N17394640: length 8.7
  TOP w0.203: USB1.10 6.15,12.65 5.5,13.3 4.4,13.3 3.1,12 3.1,9 2.45,8.35 R15.1
N17401111: length 2.1
  TOP w0.203: U30.8 38.45,6.25 38.65,6.05 R30.2

## Copper pours and planes (outline as drawn; the poured copper is in the pictures)
GND on TOP: 0.3,27.4 0.8,28.6 2,29.1 43,29.1 44.2,28.6 44.7,27.4 44.7,2 44.2,0.8 43,0.3 2,0.3 0.8,0.8 0.3,2 ; 4 cut-outs
GND on BOTTOM: 0.3,27.4 0.8,28.6 2,29.1 43,29.1 44.2,28.6 44.7,27.4 44.7,2 44.2,0.8 43,0.3 2,0.3 0.8,0.8 0.3,2 ; 2 cut-outs
GND on L02_GND: 44.7,2 44.2,0.8 43,0.3 2,0.3 0.8,0.8 0.3,2 0.3,27.4 0.8,28.6 2,29.1 43,29.1 44.2,28.6 44.7,27.4
VCC_3.3V on TOP: 12.8,26.4 12.8,27.8 13,28 15.6,28 15.8,27.8 15.8,26.3 15.7,26.2 13,26.2
VCC_3.3V on L03_VCC: 29.6,18.8 29.6,28.1 28.6,29.1 12.4,29.1 12,28.7 12,14.2 12.7,13.5 24.3,13.5
VCC_3.3V_CP2105 on TOP: 12.3,12.5 11,12.5 10.8,12.3 10.8,11.4 11,11.2 12.1,11.2 12.3,11.4
VCC_3.3V_CP2105 on TOP: 17.6,13 20.4,13 20.7,12.7 20.7,11.4 20.5,11.4 20.5,12.3 20,12.3 20,11.8 17.1,11.8 17.1,12.5
VCC_3.3V_CP2105 on BOTTOM: 11,12.5 12.2,12.5 12.3,12.4 12.3,11.4 12.1,11.2 11,11.2 10.8,11.4 10.8,12.3
VCC_5V_HW on TOP: 42,13.3 40.3,13.3 39.2,12.2 39.2,11.5 39.4,11.3 40.3,11.3 42,13
VCC_5V_HW on TOP: 16.9,3.2 16.9,5.6 17.2,5.9 19.7,5.9 19.9,5.7 19.9,4.1 19.7,3.9 18.1,3.9 18,3.8 18,3.2
VCC_5V_HW on BOTTOM: 18.1,5.4 19.8,5.4 19.9,5.3 19.9,4.1 19.8,4 18.1,4 17.9,4.2 17.9,5.2
VCC_5V_HW on BOTTOM: 40.9,13.2 39.8,13.2 39.3,12.7 39.3,11.4 39.4,11.3 40.9,11.3 41.1,11.5 41.1,13
VCC_5V_HW on L03_VCC: 33.4,9.2 34.6,10.4 39.8,10.4 41.1,11.7 41.1,13 40.9,13.2 40.1,13.2 38.9,12 32.7,12 31.65,10.95 31.65,4.05 31,3.4 29.6,3.4 28.7,2.5 20.3,2.5 19.9,2.9 19.9,5.1 19.7,5.3 18.1,5.3 17.9,5.1 17.9,1 18.4,0.5 33.1,0.5 33.4,0.8
VCC_5V_MTK on TOP: 38.7,16.4 40.6,16.4 41.1,15.9 41.1,15.4 40.7,15 38.7,15 38.6,15.1 38.6,16.3
VCC_5V_MTK on TOP: 35.7,3.3 37,3.3 37.2,3.5 37.2,5.7 37,5.9 35.6,5.9 35.5,5.8 35.5,4.8 35.7,4.6
VCC_5V_MTK on BOTTOM: 35.8,6 36.9,6 37.1,5.8 37.1,4.7 36.9,4.5 35.7,4.5 35.5,4.7 35.5,5.7
VCC_5V_MTK on BOTTOM: 38.7,16.4 40.7,16.4 40.9,16.2 40.9,15.2 40.7,15 38.7,15 38.6,15.1 38.6,16.3
VCC_5V_MTK on L03_VCC: 35.7,4.5 41.5,4.5 42.5,5.5 42.5,10 43.65,11.15 43.65,16.45 43.2,16.9 38.7,16.9 38.5,16.7 38.5,14.4 38.8,14.1 41.4,14.1 41.6,13.9 41.6,11.4 40.6,10.4 40.6,6.6 39.9,5.9 35.7,5.9 35.5,5.7 35.5,4.7
VCC_5V_VBUS on TOP: 5.4,24.6 5.4,27.8 5.6,28 12.2,28 12.4,27.8 12.4,24.6 12.3,24.5 10.2,24.5 10.2,25.3 11.6,25.3 11.8,25.5 11.8,26.3 11.6,26.5 9.5,26.5 9.2,26.2 6.9,26.2 6.6,25.9 6.6,24.6
VCC_5V_VBUS on BOTTOM: 7.1,26.2 7.1,28.9 7.3,29.1 34.5,29.1 34.8,28.8 34.8,19.6 34.7,19.5 33.6,19.5 33.4,19.7 33.4,27.5 32.6,28.3 17.6,28.3 17.4,28.1 17.4,27.4 17.3,27.3 16.4,27.3 16.3,27.4 16.3,28 16,28.3 12.5,28.3 12.3,28.1 12.3,26.1 12.1,25.9 7.4,25.9
VCC_PWR1 on TOP: 11.5,9.4 12.6,9.4 12.8,9.2 12.8,8.5 12.6,8.3 11.5,8.3 11.3,8.5 11.3,9.2
VCC_PWR1 on BOTTOM: 38.8,23.3 39.5,23.3 39.6,23.2 39.6,21.8 38.4,20.6 38.4,18.4 38.1,18.1 33.5,18.1 33.3,18.3 33.3,19 33.4,19.1 35,19.1 35.3,19.4 35.3,21.3 35.6,21.6 38,21.6 38.6,22.2 38.6,23.1
VCC_PWR1 on L03_VCC: 31.7,18.1 34.8,18.1 35,18.3 35,18.9 34.9,19 31,19 25.1,13.1 13.4,13.1 12.6,12.3 12.6,11.4 11.3,10.1 11.3,8.8 11.5,8.6 12.6,8.6 12.7,8.7 12.7,9.9 13.7,10.9 16.5,10.9 17.7,12.1 25.7,12.1
VCC_PWR2 on TOP: 16.4,3.2 16.4,5.6 16.1,5.9 5.3,5.9 4.9,5.5 4.9,3.3 5.2,3 6.7,3 7.1,3.4 7.1,4.4 7.4,4.7 12.3,4.7 12.5,4.5 12.5,3.2
VCC_PWR2 on BOTTOM: 35.2,22 37.9,22 38.3,22.4 38.3,23.4 38.7,23.8 39.5,23.8 39.7,24 39.7,24.6 39.5,24.8 37.7,24.8 37.5,24.6 37.5,23.5 37.1,23.1 35.3,23.1 35.1,22.9 35.1,22.1
VCC_PWR2 on L03_VCC: 35,22.7 36.8,22.7 37,22.5 37,18.5 36.5,18 36.5,17.2 35.7,16.4 33.1,16.4 28.8,12.1 28.8,6.1 28.3,5.6 17.3,5.6 16.4,4.7 7,4.7 6.7,4.4 6.7,3.3 6.5,3.1 4.9,3.1 4.7,3.3 4.7,5.3 5.2,5.8 15.5,5.8 16.8,7.1 27,7.1 27.4,7.5 27.4,13.2 31.9,17.7 34.7,17.7 35.2,18.2 35.2,21.5 34.8,21.9 34.8,22.5
VCC_PWR3 on TOP: 23.6,3.1 23.6,5.3 24.1,5.8 34.8,5.8 35.2,5.4 35.2,3.2 31.2,3.2 31.2,4.4 31,4.6 26.8,4.6 26.5,4.3 26.5,3.1 26.2,2.8 23.9,2.8
VCC_PWR3 on BOTTOM: 39,18.8 39.4,18.8 39.6,19 39.6,19.7 39.8,19.9 40.7,19.9 40.9,20.1 40.9,25.6 40.6,25.9 35.4,25.9 35.1,25.6 35.1,23.6 35.2,23.5 36.8,23.5 37,23.7 37,24.8 37.3,25.1 39.6,25.1 40,24.7 40,21.5 38.8,20.3 38.8,19
VCC_PWR3 on L03_VCC: 35,24.3 38.3,24.3 38.6,24 38.6,17.5 38.1,17 38.1,13.9 37.8,13.6 33.6,13.6 31.1,11.1 31.1,4.2 30.8,3.9 29.4,3.9 28.6,3.1 24.5,3.1 24.3,3.3 24.3,4.7 24.8,5.2 29,5.2 29.4,5.6 29.4,11.9 32.4,14.9 36.5,14.9 36.8,15.2 36.8,17.8 37.3,18.3 37.3,22.8 36.9,23.2 35,23.2 34.8,23.4 34.8,24.1
VCC_PWR4 on BOTTOM: 35.1,28.1 41.4,28.1 41.9,27.6 41.9,19.1 41.6,18.8 40.1,18.8 39.9,19 39.9,19.3 40,19.4 40.8,19.4 41.2,19.8 41.2,27.1 40.9,27.4 35.1,27.4 35,27.5 35,28
N17394528 on TOP: 7.7,12.4 4.1,12.4 3.5,11.8 3.5,10.7 3.7,10.5 4.6,10.5 5.8,11.7 7.7,11.7
N17394528 on TOP: 2.5,27.3 4.4,27.3 4.8,26.9 4.8,17.6 5.3,17.1 7.6,17.1 7.6,16.5 6.2,16.5 5.8,16.1 4,16.1 3.5,16.6 3.5,21 2.5,22
N17394528 on BOTTOM: 4.8,10.5 4.9,10.6 4.9,17.5 4.7,17.7 3.8,17.7 3.6,17.5 3.6,10.7 3.8,10.5

## Text on the board
Ref Des/Silkscreen Bottom: HY_TYPEC_DBUG_V10B_200811
Ref Des/Silkscreen Top: 5V_HW | 5V_MTK | OFF | ON
User.7: FIGURE | FINISHED_SIZE | 0.254 | 0.8 | 1.2x0.6 | 1.7x0.6 | DRILL CHART: TOP to BOTTOM | ALL UNITS ARE IN MILLIMETERS | PLATED | QTY | 164 | 4 | 2 | 172 | TOTAL HOLES:
